# Altium PCB Right Board.PcbDoc
Units mm, origin at the board's own origin, x right, y up, seen from the top; angles counter-clockwise.
Board outline 164.27 x 111 mm, 2 copper layers (Top Layer, Bottom Layer); 26 components, 16 nets, 100 pads, 214 vias.
Unrouted connection lines stored in the file: 2.
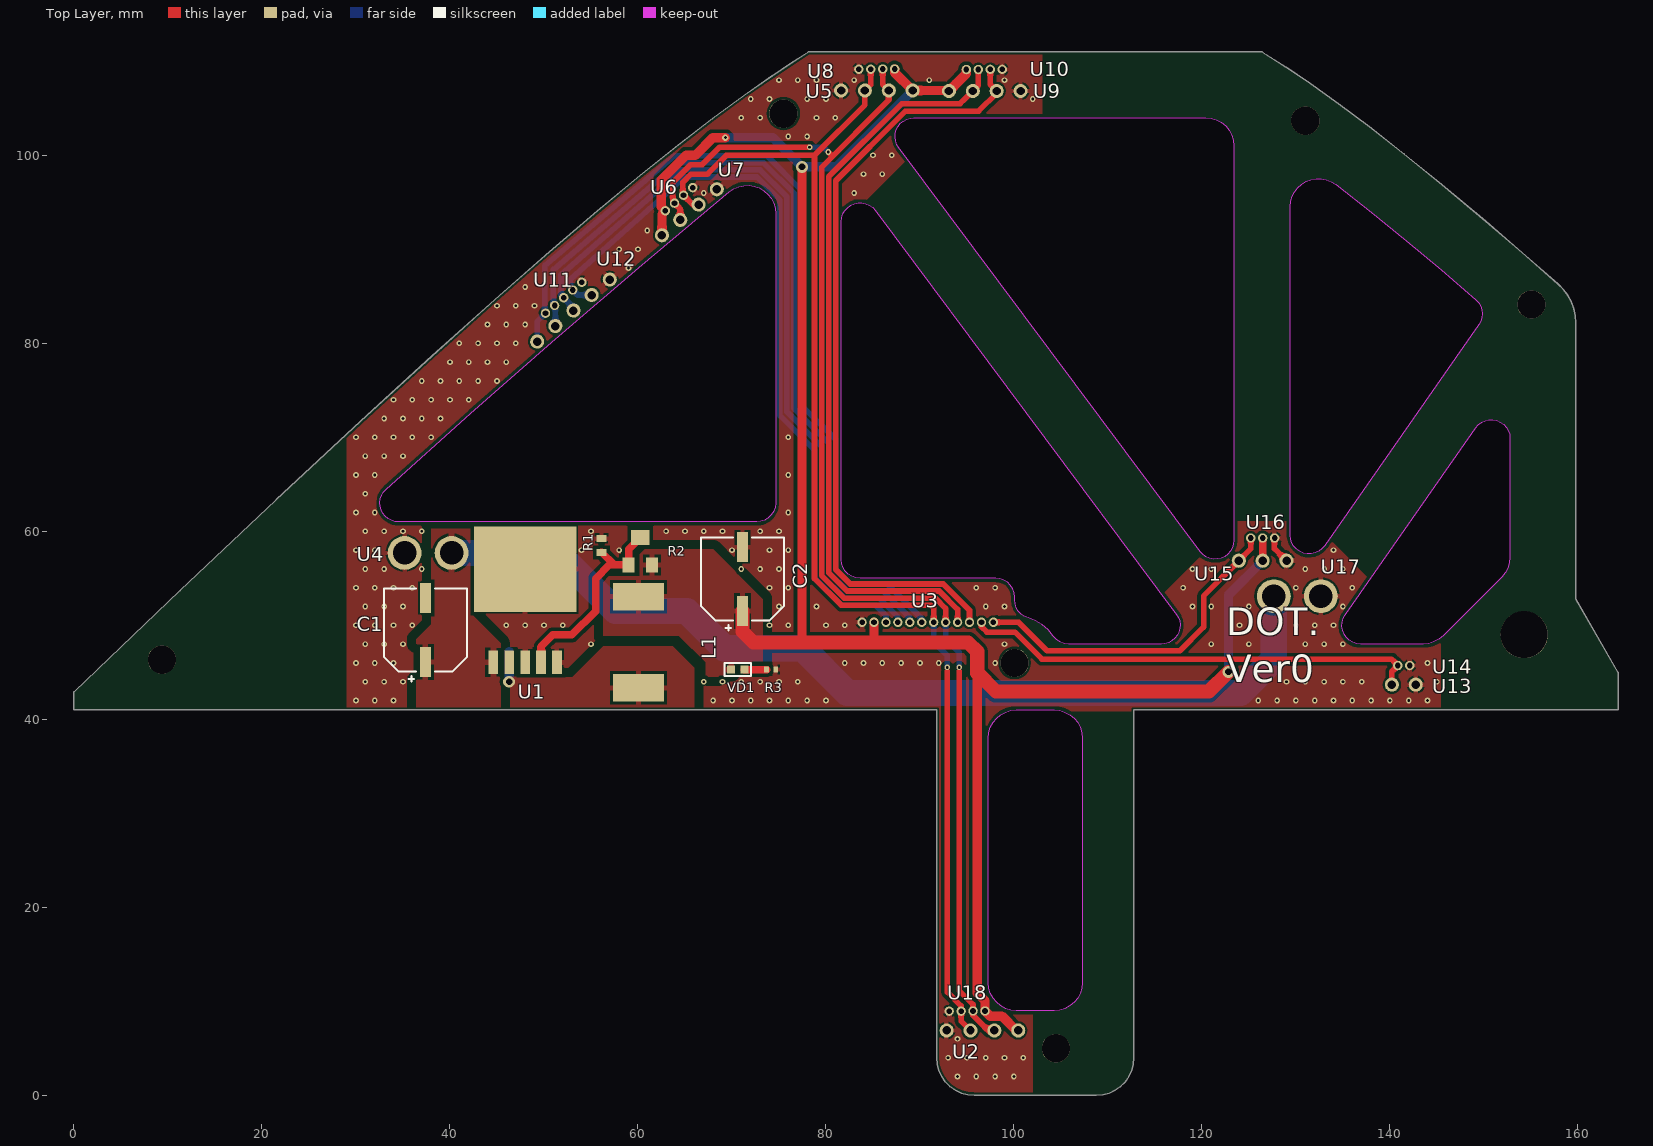
[diagram p0: Top Layer view]
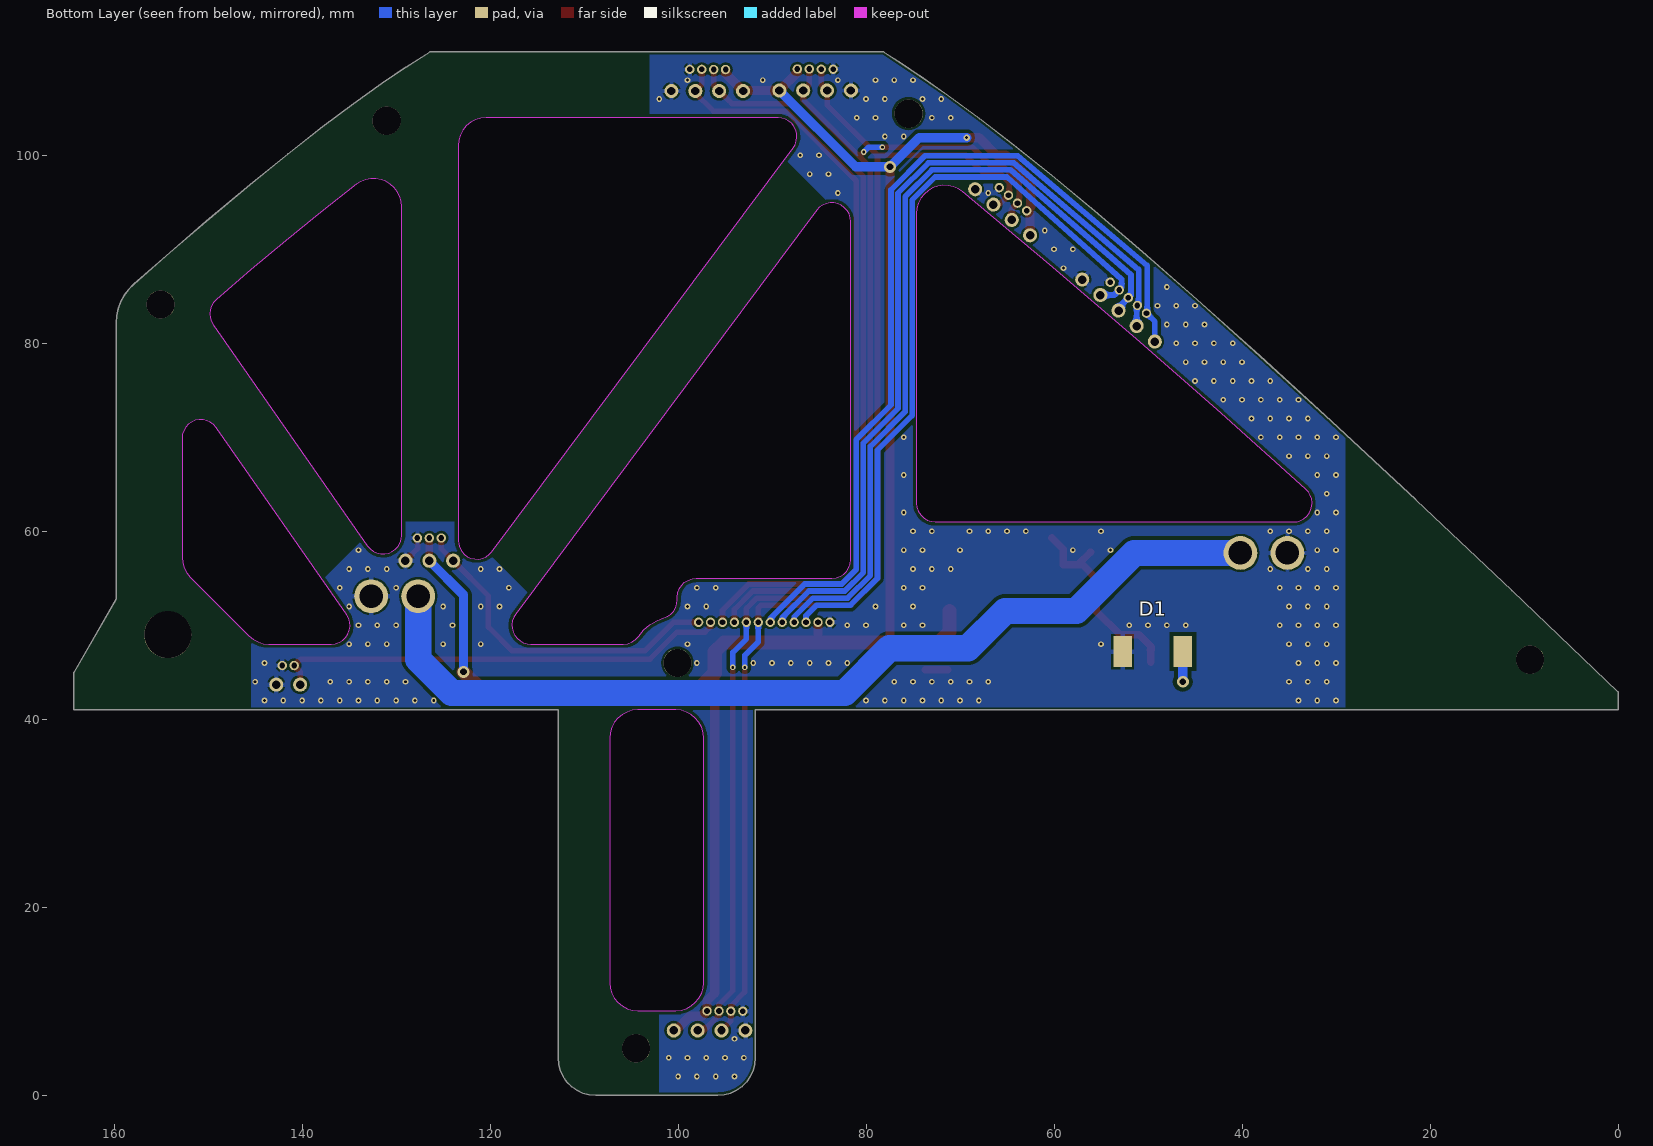
[diagram p1: Bottom Layer view, seen from below]

## Layer stack, top to bottom
Top Solder: solder mask 0.0102, Solder Resist, Dk 3.5
Top Layer: signal copper 0.0356
Dielectric 1: dielectric 0.32, FR-4, Dk 4.8
Bottom Layer: signal copper 0.0356
Bottom Solder: solder mask 0.0102, Solder Resist, Dk 3.5

## Board outline
159.77,52.794 159.77,82.167 159.715,82.942 159.552,83.702 159.283,84.43 158.914,85.114 158.453,85.739 157.908,86.293 154.067,89.653 150.199,92.977 145.546,96.874 141.506,100.151 137.821,103.029 134.521,105.499 131.483,107.665 128.968,109.366 126.4,111 78.14,111 76.205,109.758 74.292,108.479 71.264,106.357 67.941,103.909 64.291,101.102 60.237,97.859 55.673,94.081 50.596,89.749 44.79,84.662 38.113,78.675 30.499,71.712 21.509,63.348 11.291,53.703 0,42.921 0,41 91.77,41 91.77,4 91.831,3.305 92.011,2.632 92.306,2 92.706,1.429 93.199,0.936 93.77,0.536 94.402,0.241 95.075,0.061 95.77,0 108.77,0 109.465,0.061 110.138,0.241 110.77,0.536 111.341,0.936 111.834,1.429 112.234,2 112.529,2.632 112.709,3.305 112.77,4 112.77,41 164.27,41 164.27,45
cut-out: 97.27,38 97.328,38.585 97.498,39.148 97.776,39.667 98.149,40.121 98.603,40.494 99.122,40.772 99.685,40.942 100.27,41 104.27,41 104.855,40.942 105.418,40.772 105.937,40.494 106.391,40.121 106.764,39.667 107.042,39.148 107.212,38.585 107.27,38 107.27,12 107.212,11.415 107.042,10.852 106.764,10.333 106.391,9.879 105.937,9.506 105.418,9.228 104.855,9.058 104.27,9 100.27,9 99.685,9.058 99.122,9.228 98.603,9.506 98.149,9.879 97.776,10.333 97.498,10.852 97.328,11.415 97.27,12
cut-out: 134.23,96.915 138.005,93.949 141.721,90.927 145.443,87.811 149.133,84.65 149.425,84.337 149.644,83.969 149.779,83.563 149.825,83.137 149.784,82.734 149.663,82.347 149.465,81.993 133.04,58.458 132.764,58.139 132.427,57.886 132.045,57.709 131.634,57.616 131.213,57.611 130.8,57.694 130.414,57.862 130.071,58.107 129.787,58.419 129.575,58.783 129.444,59.183 129.4,59.602 129.4,94.538 129.451,95.091 129.604,95.626 129.853,96.123 130.189,96.566 130.601,96.939 131.075,97.23 131.595,97.428 132.142,97.527 132.698,97.523 133.243,97.417 133.76,97.212
cut-out: 119.797,57.85 87.765,100.804 87.559,101.149 87.425,101.527 87.37,101.925 87.395,102.325 87.5,102.713 87.68,103.072 87.928,103.387 88.234,103.647 88.586,103.84 88.969,103.96 89.369,104 120.4,104 120.985,103.942 121.548,103.772 122.067,103.494 122.521,103.121 122.894,102.667 123.172,102.148 123.342,101.585 123.4,101 123.4,59.046 123.357,58.632 123.229,58.236 123.022,57.876 122.744,57.565 122.409,57.319 122.03,57.148 121.623,57.059 121.207,57.055 120.8,57.138 120.418,57.304 120.079,57.545
cut-out: 143.527,48 136.893,48 136.46,48.047 136.048,48.187 135.676,48.413 135.362,48.713 135.12,49.075 134.962,49.481 134.895,49.911 134.923,50.345 135.044,50.763 135.253,51.145 149.13,71.028 149.406,71.346 149.743,71.6 150.125,71.777 150.536,71.87 150.957,71.875 151.37,71.792 151.756,71.624 152.099,71.378 152.382,71.067 152.595,70.703 152.726,70.303 152.77,69.884 152.77,57.243 152.712,56.657 152.542,56.095 152.264,55.576 151.891,55.121 145.649,48.879 145.194,48.506 144.675,48.228 144.113,48.058
cut-out: 74.64,93.812 74.64,63 74.59,62.555 74.442,62.132 74.204,61.753 73.887,61.436 73.508,61.198 73.085,61.05 72.64,61 34.544,61 34.146,61.04 33.763,61.158 33.412,61.351 33.107,61.609 32.859,61.923 32.678,62.28 32.572,62.665 32.545,63.065 32.598,63.461 32.728,63.839 32.932,64.184 33.2,64.481 42.195,72.549 51.282,80.513 60.46,88.372 69.729,96.124 70.196,96.441 70.714,96.665 71.265,96.788 71.829,96.806 72.387,96.718 72.918,96.526 73.404,96.239 73.827,95.865 74.173,95.419 74.43,94.916 74.587,94.374
cut-out: 100.07,52.708 100.07,53 100.02,53.445 99.872,53.868 99.634,54.247 99.317,54.564 98.938,54.802 98.515,54.95 98.07,55 83.64,55 83.195,55.05 82.772,55.198 82.393,55.436 82.077,55.753 81.838,56.132 81.69,56.555 81.64,57 81.64,92.954 81.683,93.368 81.811,93.764 82.019,94.124 82.296,94.435 82.631,94.681 83.01,94.852 83.417,94.941 83.833,94.945 84.24,94.862 84.622,94.696 84.961,94.455 85.243,94.15 117.275,51.196 117.481,50.851 117.615,50.473 117.67,50.075 117.645,49.675 117.54,49.287 117.36,48.928 117.112,48.613 116.806,48.353 116.454,48.16 116.071,48.04 115.671,48 105.815,48 105.338,48.058 104.889,48.227 104.493,48.499 104.173,48.857 103.637,49.504 103,50.051 102.281,50.485 101.499,50.792 101.105,50.956 100.756,51.2 100.466,51.513 100.25,51.88 100.115,52.284

## Design rules (kind name [scope] priority, off if disabled: settings)
BoardOutlineClearance [All] p1: gap=0.3 ignorepadtopadclearanceinfootprint=FALSE
Clearance Clearance_NPTH [All vs InPadClass('NPTH')] p1: gap=0.4 ignorepadtopadclearanceinfootprint=FALSE except(0: Arc-Hole Track-Hole SMDPad-Hole THPad-Hole Via-Hole Fill-Hole Poly-Hole Region-Hole Text-Hole)
Clearance Clearance_MultiLayerPad [OnLayer('Multi-Layer') and IsPad] p2: gap=0.25 ignorepadtopadclearanceinfootprint=FALSE except(0: Arc-Hole Track-Hole SMDPad-Hole THPad-Hole Via-Hole Fill-Hole Poly-Hole Region-Hole Text-Hole)
Clearance Clearance_Polygon [InPolygon] p3: gap=0.4 ignorepadtopadclearanceinfootprint=FALSE except(0: Arc-Hole Track-Hole SMDPad-Hole THPad-Hole Via-Hole Fill-Hole Poly-Hole Region-Hole Text-Hole; 1: Poly-Poly)
Clearance [All] p4: gap=0.15 ignorepadtopadclearanceinfootprint=FALSE except(0: Arc-Hole Track-Hole SMDPad-Hole THPad-Hole Via-Hole Fill-Hole Poly-Hole Region-Hole Text-Hole)
ComponentClearance [All] p1: gap=0 collisioncheckmode=3 verticalgap=0 showdistances=FALSE
Height [All] p1: minheight=0 maxheight=60 prefheight=12.7
HoleSize [All] p1: absolutevalues=TRUE maxlimit=5 minlimit=0.025 maxpercent=80.000 minpercent=20.000
HoleToHoleClearance [All] p1: gap=0.2 allowstackedmicrovias=TRUE
MinimumSolderMaskSliver [All] p1: minsoldermaskwidth=0.05
PlaneClearance [All] p1: clearance=0.5
PlaneConnect [All] p1: planeconnectstyle=Relief reliefexpansion=0.5 reliefentries=4 reliefconductorwidth=0.3 reliefairgap=0.2
PolygonConnect PolygonConnect_PowerPAD [All vs InPadClass('PowerPAD')] p1: connectstyle=Relief reliefconductorwidth=1 reliefentries=4 polygonreliefangle="90 Angle" airgapwidth=0.3
PolygonConnect PolygonConnect_PadGND [InNet('GND') and IsPad] p2: connectstyle=Relief reliefconductorwidth=0.5 reliefentries=4 polygonreliefangle="90 Angle" airgapwidth=0.2
PolygonConnect PolygonConnect_Via [IsVia] p3: connectstyle=Direct reliefconductorwidth=0.254 reliefentries=4 polygonreliefangle="90 Angle" airgapwidth=0.254
PolygonConnect [All] p4: connectstyle=Relief reliefconductorwidth=0.6 reliefentries=4 polygonreliefangle="90 Angle" airgapwidth=0.3
RoutingVias [All] p1: holewidth=0.3 width=0.7 viastyle="Through Hole" minholewidth=0.3 minwidth=0.7 maxholewidth=0.5 maxwidth=1.2
SilkToSilkClearance [All] p1: silktosilkclearance=0
SilkToSolderMaskClearance [IsPad] p1: minsilkscreentomaskgap=0.05 clearancetoexposedcopper=TRUE
SolderMaskExpansion [All] p1: expansion=0.075
Width [All] p1: maxlimit=10 minlimit=0.15 preferedwidth=0.15
21 further rules are at their usual default settings.

## Classes and differential pairs
component class "U_5V Sheet": C1 C2 D1 L1 R1 R2 U1
component class "Main Sheet": R3 U2 U3 U4 U5 U6 U7 U8 U9 U10 U11 U12 U13 U14 U15 U16 U17 U18 VD1

## Components (designator, comment, footprint, x,y, rotation, side; value= is the part's Value field where it differs from the comment)
C1 "Value" D8C3.2H12 37.4,49.5 r90 top
C2 "Value" D8C3.2H12 71.125,54.925 r90 top
D1 "MBRS340T3G" DO214AB(SMC) 49.5,47.2 r180 bottom
L1 "Value" SRR1280 60.06,48.2 r90 top
R1 "1.21k" res0603 56.125,58.5 r90 top
R2 "Value" 3224W 60.25,57.825 r270 top
R3 "=Value" res0402 74.168,45.3 r180 top
U1 "LM2596S-ADJ" TO263-5L 47.971,52.088 r0 top
U2 "Header 4" 4x2.54 96.65,6.9 r180 top
U3 "Header 12" 12x1.27 90.83,50.325 r180 top
U4 "?" XT30 37.675,57.7 r0 top
U5 "Header 4" 4x2.54 85.417,106.896 r180 top
U6 "Header 4" 4x1.27 64.375,95.325 r40 top
U7 "Header 4" 4x2.54 65.475,93.943 r40 top
U8 "Header 4" 4x1.27 85.405,109.182 r180 top
U9 "Header 4" 4x2.54 96.898,106.846 r0 top
U10 "Header 4" 4x1.27 96.85,109.125 r0 top
U11 "Header 5" 5x1.27 52.102,84.852 r40.5 top
U12 "Header 5" 5x2.54 53.143,83.489 r40.5 top
U13 "Header 2" 2x2.54 141.478,43.688 r0 top
U14 "Header 2" 2x1.27 141.478,45.72 r0 top
U15 "Header 3" 3x2.54 126.461,56.873 r0 top
U16 "Header 3" 3x1.27 126.461,59.286 r0 top
U17 "?" XT30 130.15,53.1 r0 top
U18 "Header 4" 4x1.27 95.018,8.975 r180 top
VD1 "*" CH0603LB 70.612,45.3 r0 top

## Footprints (in the part's own frame and the unit in brackets; to place one, negate y for a bottom-side part, rotate by r counter-clockwise, add the part's x,y. Pads: shape width x height; smd on the part's side, far side on the other; paste and mask are expansions set on the pad)
2x1.27 [mm]
  round 1 hole 0.6: 1(-0.635,0) 2(0.635,0)
2x2.54 [mm]
  round 1.5 hole 0.9 paste+6: 1(-1.27,0) 2(1.27,0)
3x1.27 [mm]
  round 1 hole 0.6: 1(-1.27,0) 2(0,0) 3(1.27,0)
3x2.54 [mm]
  round 1.5 hole 0.9: 1(-2.54,0) 2(0,0) 3(2.54,0)
4x1.27 [mm]
  round 1 hole 0.6: 1(-1.905,0) 2(-0.635,0) 3(0.635,0.02) 4(1.905,0.02)
4x2.54 [mm]
  round 1.5 hole 0.9: 1(-3.81,0) 2(-1.27,0) 3(1.27,0) 4(3.81,0)
5x1.27 [mm]
  round 1 hole 0.6: 1(-2.54,0) 2(-1.27,0) 3(0,0) 4(1.27,0) 5(2.54,0)
5x2.54 [mm]
  round 1.5 hole 0.9: 1(-5.08,0) 2(-2.54,0) 3(0,0) 4(2.54,0) 5(5.08,0)
12x1.27 [mm]
  round 1 hole 0.6: 1(-6.985,0) 2(-5.715,0) 3(-4.445,0) 4(-3.175,0) 5(-1.905,0) 6(-0.635,0) 7(0.635,0) 8(1.905,0) 9(3.175,0) 10(4.445,0) 11(5.715,0) 12(6.985,0)
3224W [mm]
  rect 1.6x1.3 smd: 1(1.4,-1.25) 3(1.4,1.25)
  rect 1.6x2 smd: 2(-1.5,0)
  body extent -2.04,-2.42 1.92,2.41, height 5.28
CH0603LB [mm] "Chip Capacitor, 2-Leads, Body 1,53x0,85mm, IPC Medium Density"
  rect 0.85x0.85 smd: 1(-0.7,0) 2(0.7,0)
  silkscreen extent -1.4,-0.7 1.4,0.7, body extent -0.8,-0.4 0.8,0.4, height 0.6
D8C3.2H12 [mm]
  rect 3.2x1.2 smd: 1(-3.4,0) 2(3.4,0)
  round 0.5 on Mech1: ""(-4.3,-3.7)
  silkscreen extent -5.5,-4.4 4.4,4.4, body extent -4.85,-4.25 4.85,4.25, height 10.5
DO214AB(SMC) [mm]
  rect 2x3.3 smd: 1(-3.2,0) 2(3.2,0)
  body extent -4.07,-3.12 4.08,3.13, height 2.64
res0402 [mm]
  rect 0.5x0.65 smd: 1(-0.48,0) 2(0.48,0)
  body extent -0.5,-0.25 0.5,0.25, height 0.34
res0603 [mm]
  rect 0.75x1.016 smd: 1(-0.74,0) 2(0.74,0)
  body extent -0.8,-0.4 0.8,0.4, height 0.49
SRR1280 [mm]
  rect 2.9x5.4 smd: 1(-4.85,0) 2(4.85,0)
  body extent -6.25,-6.25 6.25,6.25, height 7.5
TO263-5L [mm]
  rect 1.05x2.5 smd: 1(-3.365,-6.02) 2(-1.665,-6.02) 3(0.035,-6.02) 4(1.735,-6.02) 5(3.435,-6.02)
  rect 10.9x9.1 smd: 3(0.035,3.88)
  body extent -4.88,-6.98 4.95,7.62, height 4.22
XT30 [mm]
  round 3.6 hole 2.5 paste+6: 1(-2.5,0) 2(2.5,0)

## Part data
C1: library part "Cap Tantal"
C2: library part "Cap Electrolytic"
L1: library part Inductor
R1 R3: library part "Resistor SMD"
R2: library part Potentiometer
U4 U17: library part "Power connectors"
VD1: library part LED

## Free pads (board coordinates)
  round 3 hole 3: 1(9.364,46.346) 1(75.47,104.433) 1(100.07,46) 1(104.47,5) 1(131,103.682) 1(155.059,84.134)
  round 5 hole 5: 1(154.27,49)

## Via types
v1: diameter 0.6, hole 0.3, Top Layer to Bottom Layer, 210 vias
v2: diameter 1.27, hole 0.711, Top Layer to Bottom Layer, 3 vias
v3: diameter 0.7, hole 0.3, Top Layer to Bottom Layer, 1 vias

## Nets (pads, with @x,y where several pads share a name; then routed paths per layer and width w, separated by ;. In a path a pad name is that pad's centre, name@x,y a point inside that pad or via, vN(x,y) a via of type N, cw(c..) or ccw(c..) an arc to the next point about the centre after c; other vN are vias at no path point)
+5: C2.1 L1.2 R2.3 U2.1 U3.11 U5.1 U6.1 U7.1 U8.1 U9.1 U10.1 U15.2 U16.2 U18.1 VD1.1 | length 217.4
  Top Layer w0.8: U15.2 U16.2
  Top Layer w1: U7.1 62.556,93.741 U6.1 62.482,94.534 62.482,97.376 65.121,100.015 66.115,100.015 67.983,101.883 v3(69.3,101.883) ; v2(77.45,98.775) 77.45,48.275 77.55,48.175 ; 85.115,48.175 U3.11 ; U8.1 87.31,108.813 U5.1 93.038,106.896 U9.1 94.945,108.703 U10.1 ; 96.1,44.95 96.1,10.875 96.923,10.052 U18.1 97.47,8.428 98.722,8.428 100.25,6.9 U2.1
  Top Layer w1.5: C2.1 71.125,49.35 72.3,48.175 77.55,48.175 85.115,48.175 95.125,48.175 96.1,47.2 96.1,44.95 98.1,42.95 120.725,42.95 v2(122.825,45.05)
  Bottom Layer w1: v3(69.3,101.883) 74.342,101.883 v2(77.45,98.775) 81.106,98.775 U5.1 ; v2(122.825,45.05) 122.825,53.237 U15.2
+12: C1.1 U1.1 U4.2 U17.1 | length 101.9
  Bottom Layer w2.8: U4.2 51.475,57.7 57.65,51.525 65.2,51.525 69.15,47.575 77.5,47.575 82.275,42.8 124.075,42.8 127.65,46.375 U17.1
BALL: U3.2 U13.1 U14.1 | length 48.8
  Top Layer w0.6: U3.2 96.545,49.855 97.125,49.275 100.1,49.275 102.975,46.4 140.163,46.4 U14.1 140.208,45.085 U13.1
BUT1: U3.10 U11.4 U12.4 | length 82.6
  Bottom Layer w0.6: U12.4 53.606,85.139 U11.4 52.807,85.938 52.807,86.825 65.021,97.7 72.65,97.7 75.1,95.25 75.1,72.325 78.79,68.635 78.79,55.009 81.649,52.15 85.25,52.15 86.385,51.015 U3.10
BUT2: U3.9 U11.3 U12.3 | length 86.1
  Bottom Layer w0.6: U12.3 53.143,83.811 U11.3 51.822,85.132 51.822,87.3 64.65,98.45 73,98.45 75.85,95.6 75.85,72.725 79.54,69.035 79.54,55.32 81.96,52.9 85.65,52.9 87.655,50.895 U3.9
BUT3: U3.8 U11.2 U12.2 | length 90.2
  Bottom Layer w0.6: U12.2 51.221,81.848 51.221,83.952 51.212,83.952 U11.2 51,84.163 51,87.85 64.3,99.2 73.375,99.2 76.6,95.975 76.6,73.075 80.29,69.385 80.29,55.63 82.27,53.65 86.075,53.65 88.925,50.8 U3.8
BUT4: U3.7 U11.1 U12.1 | length 95.2
  Bottom Layer w0.6: U12.1 49.28,82.312 U11.1 50.086,83.287 50.086,88.275 63.875,99.95 73.725,99.95 77.35,96.325 77.35,73.45 81.04,69.76 81.04,55.941 82.581,54.4 86.525,54.4 90.195,50.73 U3.7
ESC: U3.1 U15.1 U16.1 | length 36.2
  Top Layer w0.6: U3.1 100.5,50.325 103.525,47.3 117.65,47.3 120.175,49.825 120.175,53.127 U15.1 125.211,58.163 U16.1@125.211,59.286
GND: C1.2 C2.2 D1.1 R1.2 R3.1 U1.3 U1.5 U2.4 U3.12 U4.1 U5.4 U6.4 U7.4 U8.4 U9.4 U10.4 U11.5 U12.5 U13.2 U14.2 U15.3 U16.3 U17.2 U18.4 | length 2.9
  Top Layer w0.6: U16.3@127.711,59.286 127.711,58.163 U15.3
  other v1: 94,2 96,2 98,2 100,2 93,4 95,4 97,4 99,4 101,4 94,6 30,42 32,42 34,42 68,42 70,42 72,42 74,42 76,42 78,42 80,42 126,42 128,42 130,42 132,42 134,42 136,42 138,42 140,42 142,42 144,42 31,44 33,44 35,44 67,44 69,44 71,44 73,44 75,44 77,44 129,44 131,44 133,44 135,44 137,44 145,44 30,46 32,46 34,46 82,46 84,46 86,46 88,46 90,46 92,46 98,46 144,46 31,48 33,48 35,48 55,48 99,48 121,48 125,48 131,48 133,48 135,48 30,50 32,50 34,50 36,50 46,50 48,50 50,50 52,50 74,50 76,50 80,50 82,50 124,50 130,50 132,50 134,50 31,52 33,52 35,52 75,52 79,52 97,52 99,52 119,52 121,52 125,52 135,52 30,54 32,54 34,54 36,54 74,54 76,54 96,54 98,54 118,54 130,54 136,54 31,56 33,56 37,56 71,56 73,56 75,56 119,56 121,56 131,56 133,56 135,56 30,58 32,58 54,58 58,58 70,58 74,58 76,58 134,58 31,60 33,60 35,60 37,60 55,60 63,60 65,60 67,60 69,60 73,60 75,60 30,62 32,62 76,62 31,64 30,66 32,66 76,66 31,68 33,68 35,68 30,70 32,70 34,70 36,70 38,70 76,70 33,72 35,72 37,72 39,72 34,74 36,74 38,74 40,74 42,74 37,76 39,76 41,76 43,76 45,76 40,78 42,78 44,78 46,78 41,80 43,80 45,80 47,80 44,82 46,82 48,82 45,84 47,84 49,84 48,86 59,88 58,90 60,90 61,92 67,96 83,96 84,98 86,98 85,100 87,100 76,102 78,102 71,104 73,104 79,104 81,104 72,106 74,106 78,106 80,106 102,106 75,108 77,108 79,108 83,108 91,108 99,108
IMU_RX: U3.3 U9.3 U10.3 | length 82.3
  Top Layer w0.6: U3.3 95.275,51.6 92.475,54.4 82.581,54.4 81.04,55.941 81.04,97.29 88.45,104.7 96.247,104.7 U9.3@98.193,106.646 ; U10.3 97.485,107.529 U9.3
IMU_TX: U3.4 U9.2 U10.2 | length 80.6
  Top Layer w0.4: U10.2@96.136,109.112 U10.2@96.215,109.033
  Top Layer w0.6: U3.4 94.005,51.695 92.05,53.65 82.25,53.65 80.29,55.61 80.29,97.715 88.075,105.5 94.282,105.5 94.754,105.971 U9.2 96.215,107.433 96.215,109.033 U10.2
NetD1_2: D1.2 L1.1 U1.2 | length 3.2
  Bottom Layer w0.8: v2@46.3,44.006 v2(46.306,44)
  Bottom Layer w1: v2@46.3,44.006 D1.2
NetR1_1: R1.1 R2.1 R2.2 U1.4 | length 21.9
  Top Layer w0.8: U1.4 49.706,47.756 50.925,48.975 52.975,48.975 55.5,51.5 55.5,54.975 56.95,56.425 57.46,56.425 ; R1.1 57.46,56.425 ; R2.2 59,58.075 R2.1 57.46,56.425
NetR3_2: R3.2 VD1.2 | length 2.4
  Top Layer w0.8: VD1.2 R3.2
SCL: U2.3 U3.6 U5.3 U6.3 U7.3 U8.3 U18.3 | length 135.4
  Top Layer w0.6: U7.3 65.837,94.76 U6.3 64.771,95.826 64.771,97.118 65.653,98 67.394,98 69.409,100.015 78.79,100.015 ; U8.3 84.77,107.519 U5.3 84.147,105.372 78.79,100.015 ; U3.6 91.465,51.86 91.175,52.15 81.629,52.15 78.79,54.988 78.79,100.015 ; 92.925,45.1 92.925,10.975 94.383,9.517 U18.3 94.383,7.897 U2.3
  Bottom Layer w0.6: U3.6 91.465,48.235 92.9,46.8 v1(92.9,45.525)
SDA: U2.2 U3.5 U5.2 U6.2 U7.2 U8.2 U18.2 | length 142
  Top Layer w0.6: U7.2 64.502,94.303 U6.2 63.7,95.105 63.7,97.108 65.592,99 66.831,99 68.692,100.861 v1(78.264,100.861) ; v1(80.25,100.35) 80.709,99.891 ; U8.2 86.04,107.543 U5.2 86.687,105.869 79.54,98.722 79.54,55.299 81.939,52.9 91.625,52.9 92.735,51.79 U3.5 ; 94.2,45.1 94.2,11.875 94.2,11.108 95.653,9.655 U18.2 95.653,8.522 97.275,6.9 U2.2
  Bottom Layer w0.6: v1(78.264,100.861) 79.739,100.861 v1(80.25,100.35) ; U3.5 92.735,48.565 94.175,47.125 v1(94.175,45.525)
pads on no net: C1. C2.

## Polygon pours and split planes (outlines as drawn)
GND on Top Layer "top gnd" (solid, pour order 16): 29,40 69,0 102,0 102,40.747 101.89,40.857 145.278,40.857 145.421,41 145.421,54 138.721,54 131.634,61.086 121.415,61.086 121.415,58.912 115,52.496 83.625,83.872 83.625,94.55 91.075,102 103,102 103,113 62.556,113 62.556,109.556 29,76
+5 on Top Layer "Top Layer-+5" (solid, pour order 10): 56.3,48.9 56.3,54.6 56.9,55.2 60.2,55.2 60.2,57.55 60.725,58.075 68.022,58.075 73.297,52.8 73.297,44.525 67.2,44.525 67.2,46.063 64.363,48.9
no net on Top Layer "Top Layer-No Net" (solid, pour order 14): 27,70
NetD1_2 on Top Layer "Top Layer-NetD1_2" (solid, pour order 6): 45.4,48.2 45.4,41.3 66,41.3 66,45.5 63.7,47.8 56.3,47.8 53,44.5 47.15,44.5 47.15,48.2
no net on Top Layer "Top Layer-No Net 1" (solid, pour order 4): 45.025,45.825
+12 on Top Layer "Top Layer-+12" (solid, pour order 2): 38,60.3 38,50.1 36.4,48.5 36.4,41.306 45.4,41.306 45.4,48.1 42.4,51.1 42.4,60.3
GND on Bottom Layer "bottom gnd" (solid, pour order 18): 29,71 29,39 52.465,39 91.465,0 102,0 102,40.772 144.65,40.772 145.421,40 145.421,51 141.634,51 131.634,61 122.409,61 122.409,59.905 115,52.496 84,83.496 84,94.981 92.513,103.494 103,103.494 103,114 36,114 36,82.531 30,76.531

## Silkscreen, mask and mechanical layers (free items; w line width, h text height)
Top Overlay:
  text "DOT. / Ver0" at 122.577,43 h5
Mechanical 5:
  drawing of 291 lines, arcs and shapes, not listed